# Altium PCB batteryPCB.PcbDoc
Units mm, origin at the board's own origin, x right, y up, seen from the top; angles counter-clockwise.
Board outline 73.43 x 79.43 mm, 2 copper layers (Top Layer, Bottom Layer); 14 components, 9 nets, 107 pads, 11 vias.
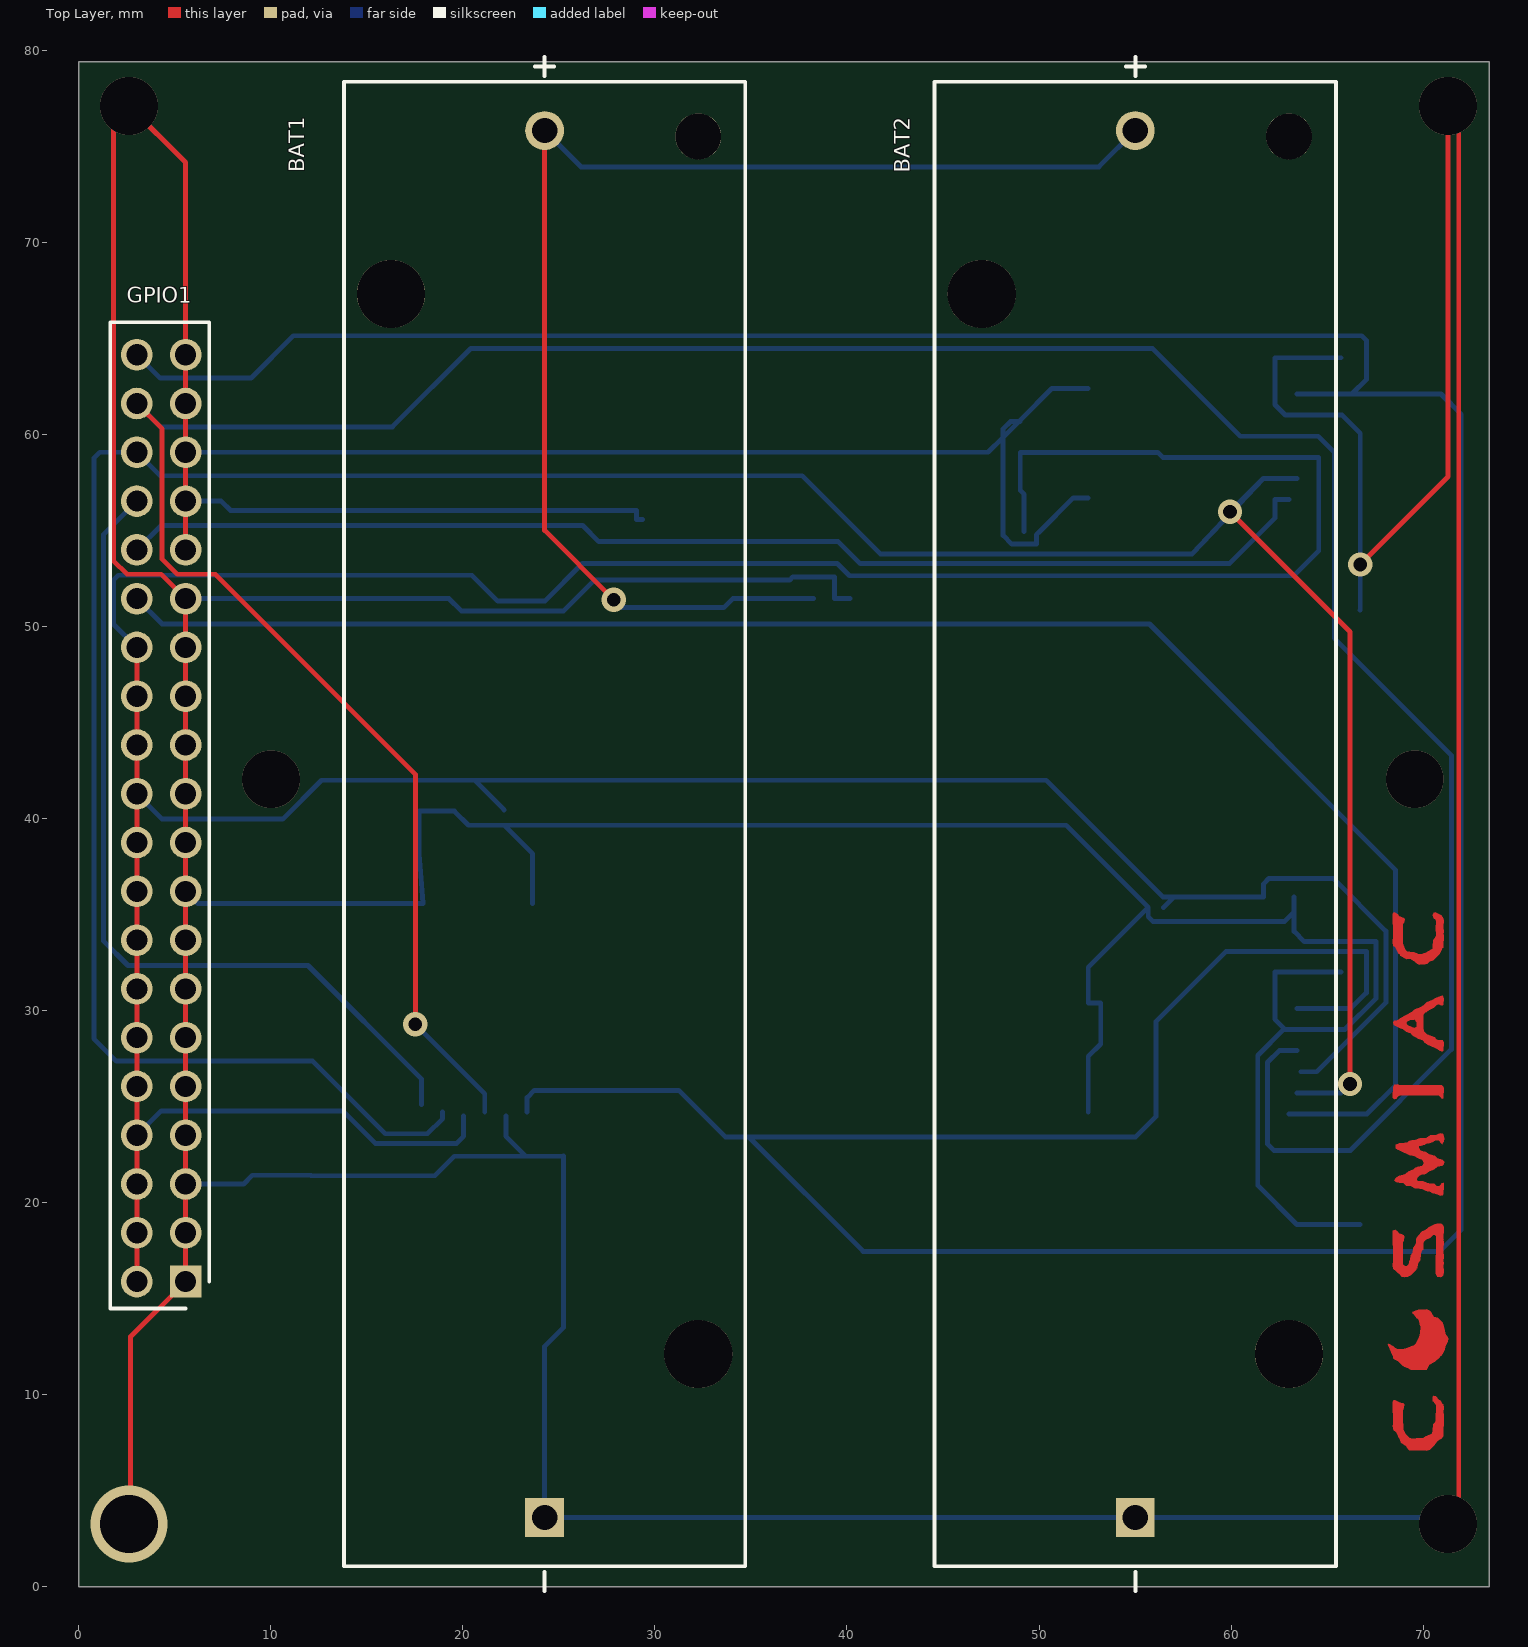
[diagram p0: Top Layer view]
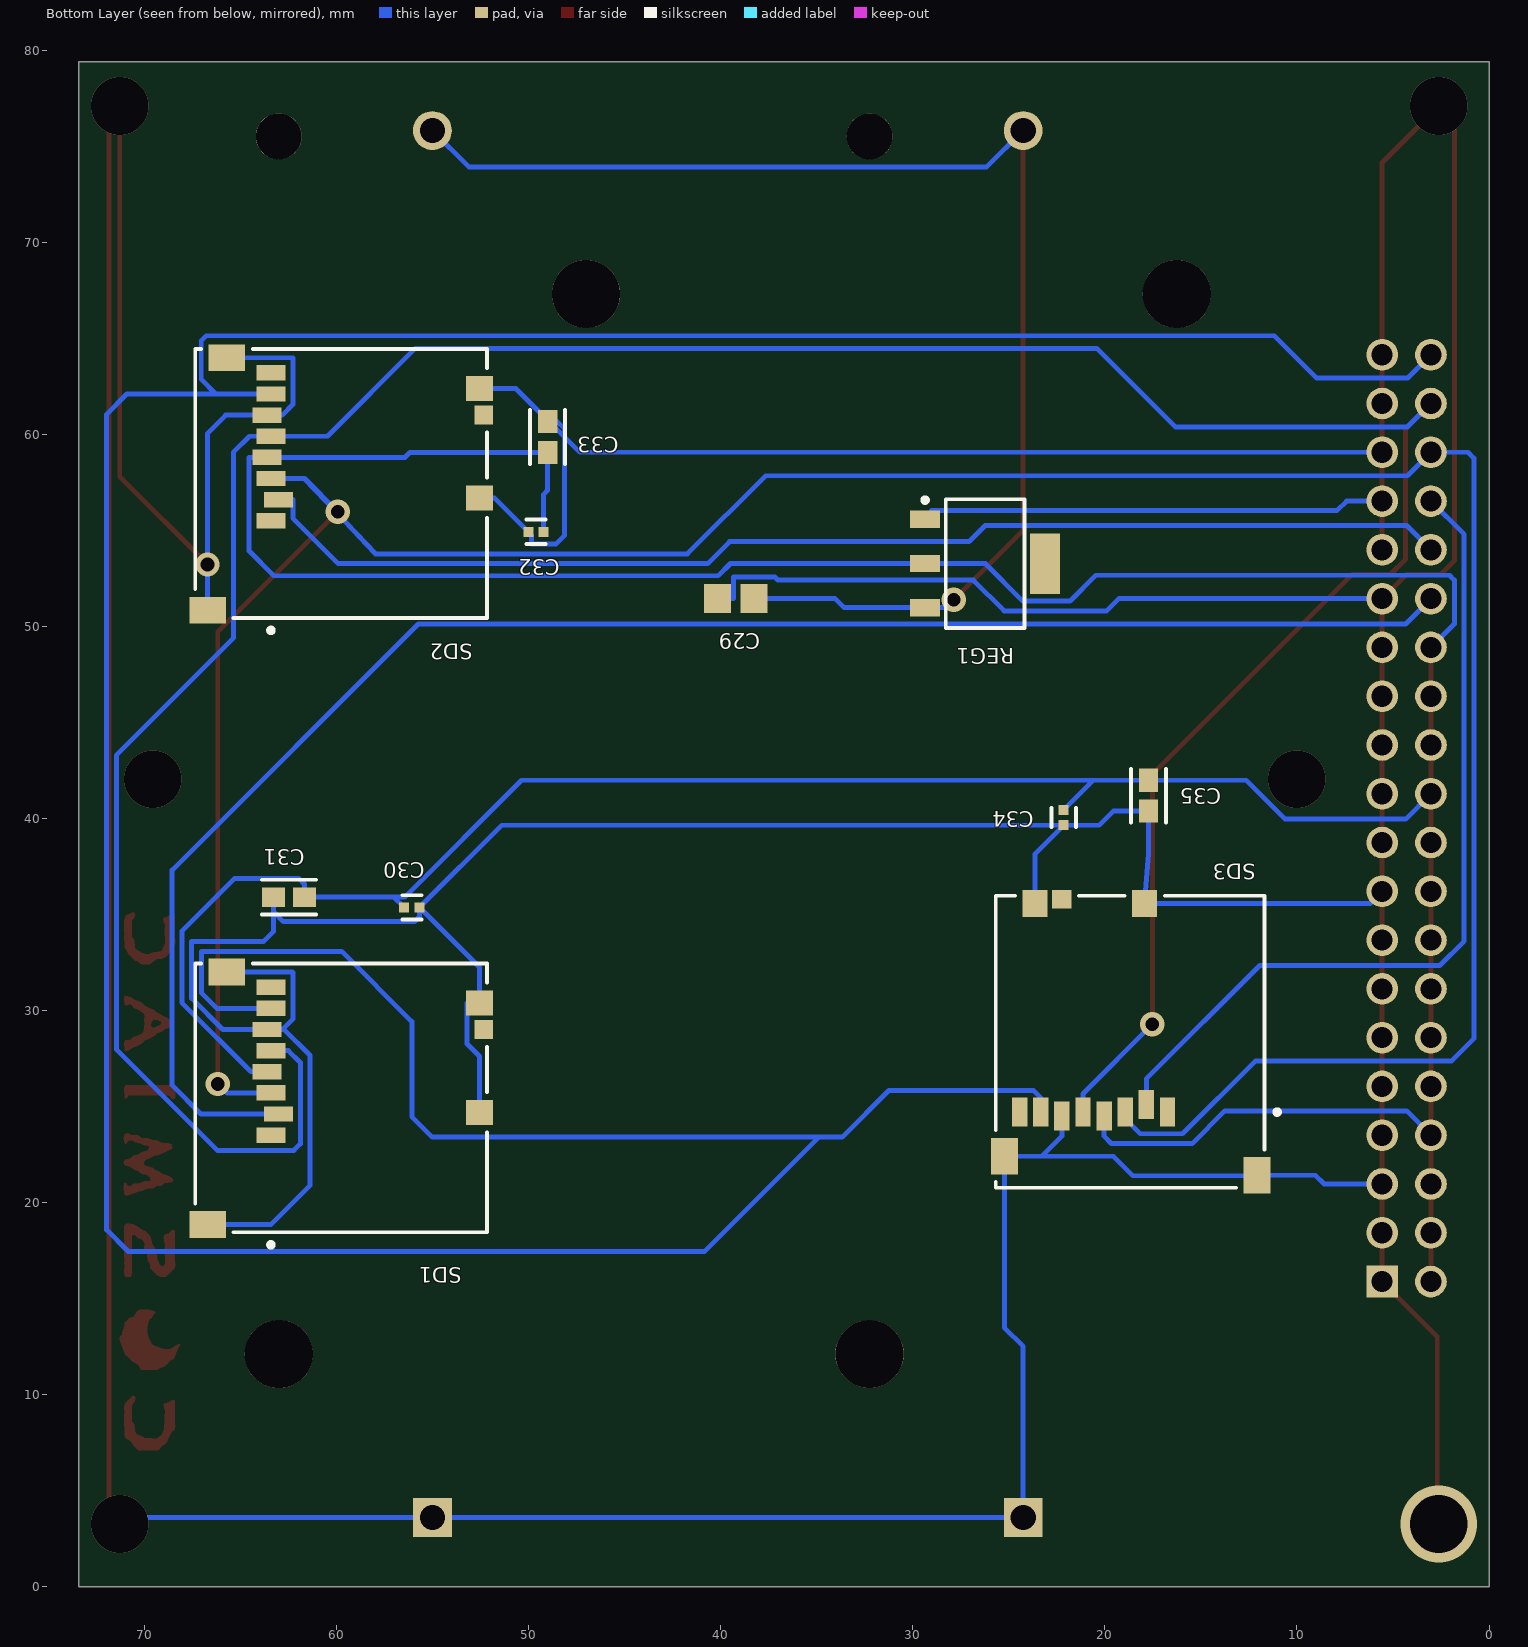
[diagram p1: Bottom Layer view, seen from below]
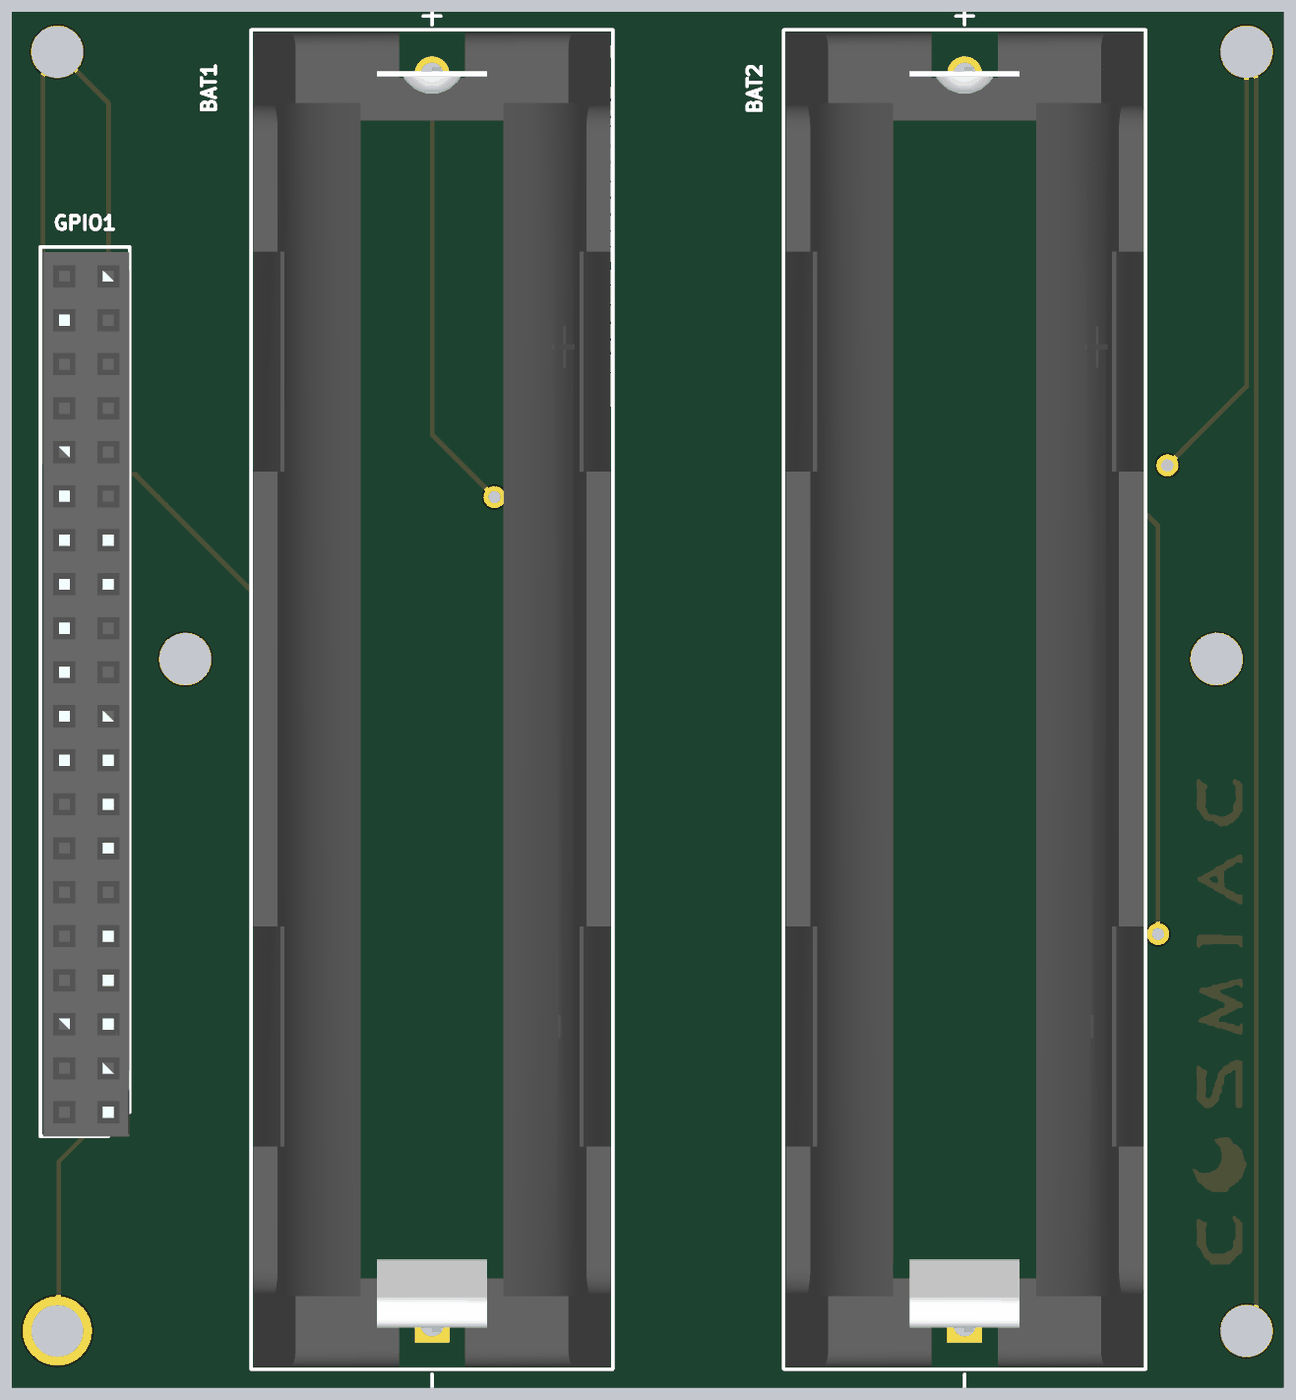
[diagram p2: 3D render of the assembled board from above, using the file's embedded part models]
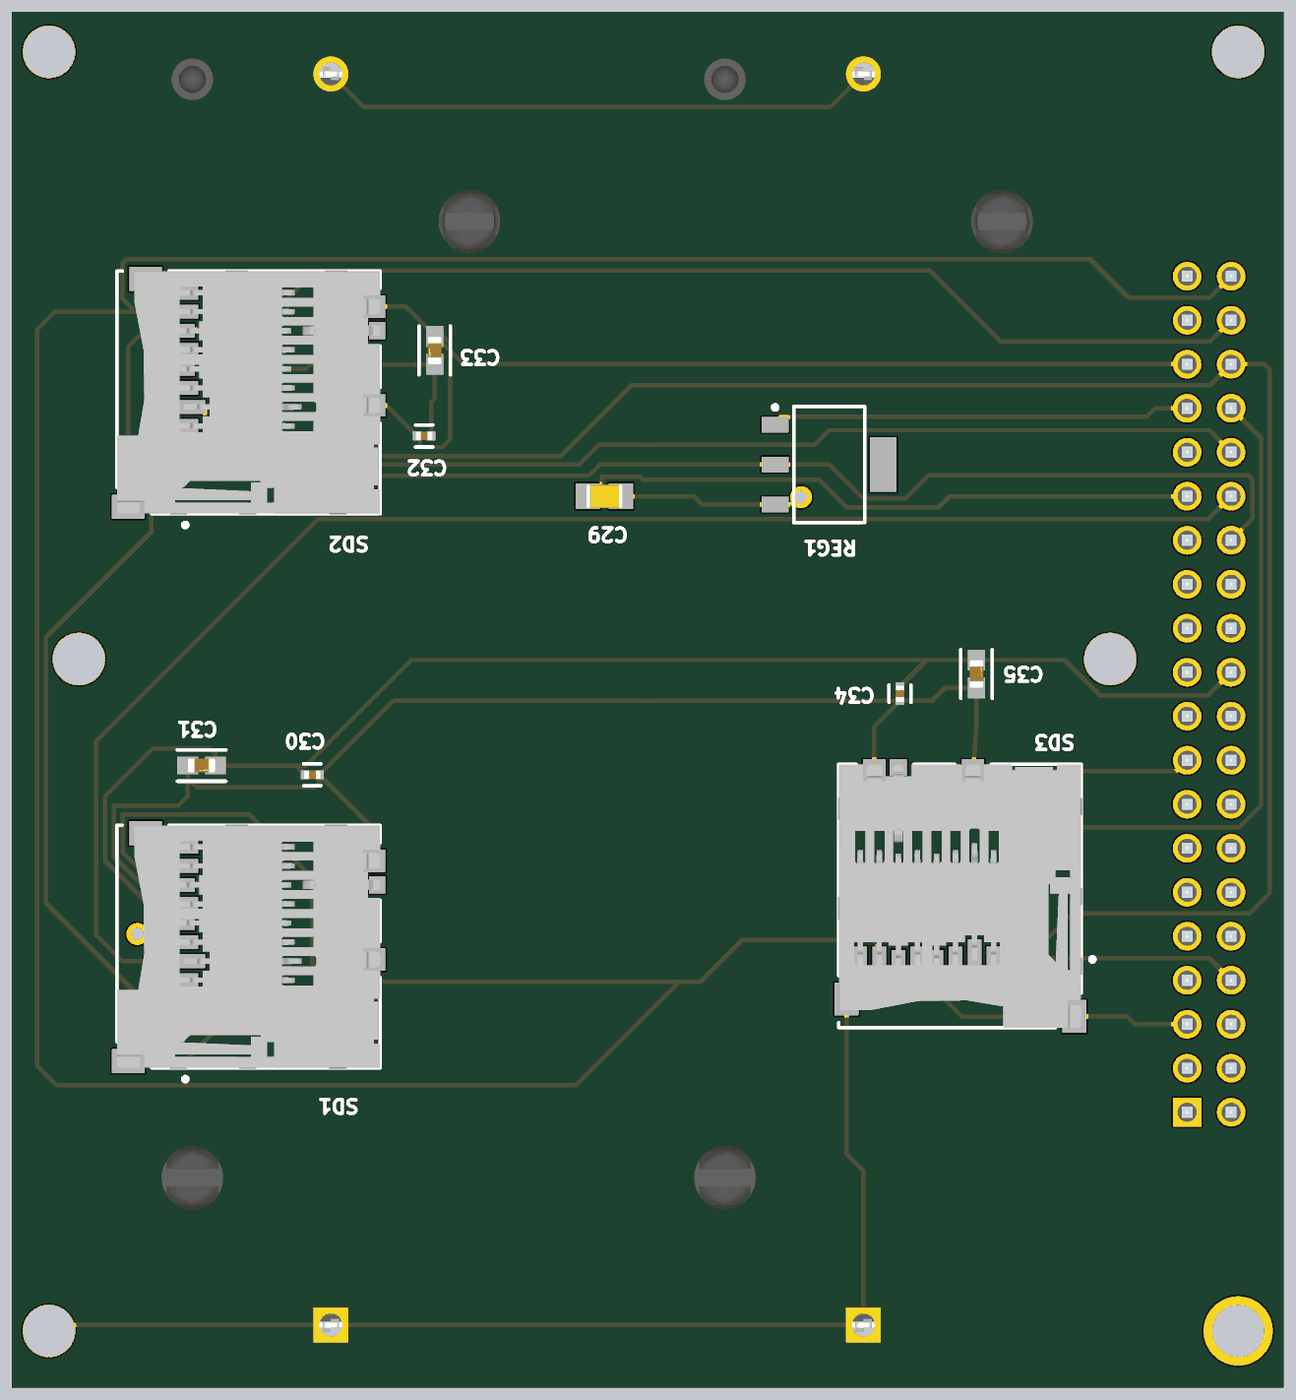
[diagram p3: 3D render of the assembled board from below, using the file's embedded part models]

## Layer stack, top to bottom
Top Solder: solder mask 0.0102, Solder Resist, Dk 3.5
Top Layer: signal copper 0.0356
Dielectric 1: dielectric 0.32, FR-4, Dk 4.8
Bottom Layer: signal copper 0.0356
Bottom Solder: solder mask 0.0102, Solder Resist, Dk 3.5

## Board outline
0,0 73.431,0 73.431,79.426 0,79.426

## Design rules (kind name [scope] priority, off if disabled: settings)
Clearance [All] p1: gap=0.254 ignorepadtopadclearanceinfootprint=FALSE
PolygonConnect [All] p1: connectstyle=Relief reliefconductorwidth=0.254 reliefentries=4 polygonreliefangle="90 Angle" airgapwidth=0.254
RoutingVias [All] p1: holewidth=0.711 width=1.27 viastyle="Through Hole" minholewidth=0.711 minwidth=1.27 maxholewidth=0.711 maxwidth=1.27
SolderMaskExpansion [All] p1: expansion=0.102 istentingtop=FALSE
SupplyNets "Schematic Supply Nets_2" [InNet('3V3_BAT')] p1: voltage=0.000
SupplyNets "Schematic Supply Nets" [InNet('GND')] p2: voltage=0.000
Width [All] p1: maxlimit=0.254 minlimit=0.254 preferedwidth=0.254
30 further rules are at their usual default settings.

## Classes and differential pairs
component class sdBatteryBoard: C30 C31 C32 C33 C34 C35 SD1 SD2 SD3
component class batteryBoardSheet1: BAT1 BAT2 C29 GPIO1 REG1

## Components (designator, comment, footprint, x,y, rotation, side; value= is the part's Value field where it differs from the comment)
BAT1 "1043P" FP-1043P-MFG 24.257,39.726 r90 top locked
BAT2 "1043P" FP-1043P-MFG 55.016,39.726 r90 top locked
C29 "4.7uF" CAPC2013X135X45LL10T25 39.218,51.46 r180 bottom
C30 "100nF" FP-C0402-BB-MFG 56.09,35.382 r180 bottom value="0.10 μF"
C31 "10uF" FP-GRM188-0_1-e0_2_0_55-IPC_A 62.484,35.916 r180 bottom
C32 "100nF" FP-C0402-BB-MFG 49.625,54.94 r0 bottom value="0.10 μF"
C33 "10uF" FP-GRM188-0_1-e0_2_0_55-IPC_A 49.022,59.879 r270 bottom
C34 "100nF" FP-C0402-BB-MFG 22.149,40.062 r270 bottom value="0.10 μF"
C35 "10uF" FP-GRM188-0_1-e0_2_0_55-IPC_A 17.729,41.199 r90 bottom
GPIO1 "2223" RHDR40W64P254X254_2X20_5105X500X865P 5.563,15.9 r90 top
REG1 "3V3" ADI-KC-3_L 26.238,53.289 r180 bottom
SD1 "473521001" MOLX-473521001_V 59.766,25.464 r270 bottom
SD2 "473521001" MOLX-473521001_V 59.766,57.455 r270 bottom
SD3 "473521001" MOLX-473521001_V 18.682,28.385 r180 bottom

## Footprints (in the part's own frame and the unit in brackets; to place one, negate y for a bottom-side part, rotate by r counter-clockwise, add the part's x,y. Pads: shape width x height; smd on the part's side, far side on the other; paste and mask are expansions set on the pad)
ADI-KC-3_L [mm] "SOT223, 4-Leads, Body 6.5x3.5mm, Pitch 2.3mm, IPC High Density"
  rect 1.55x0.9 smd: 1(-3.125,2.3) 2(-3.125,0) 3(-3.125,-2.3)
  rect 1.55x3.15 smd: 4(3.125,0)
  silkscreen extent -3.25,-3.35 2.05,3.42, body extent -1.85,-3.35 1.85,3.35, height 1.8
CAPC2013X135X45LL10T25 [mm] "Chip Capacitor, 2-Leads, Body 2.10x1.35mm, IPC High Density"
  rect 1.4x1.5 smd: 1(-0.95,0) 2(0.95,0)
  body extent -1.05,-0.67 1.05,0.67, height 1.35
FP-1043P-MFG [mm]
  rect 2.02x2.02 hole 1.32 paste-2539.97 mask+0: 1(-36.11,0)
  round 2.02 hole 1.32 paste-2539.97 mask+0: 2(36.11,0)
  round 3.55 hole 3.55 unplated paste-2539.97 mask+0: ""(-27.6,-8) ""(27.6,8)
  round 2.39 hole 2.39 unplated paste-2539.97 mask+0: ""(35.8,-8)
  silkscreen extent -39.95,-10.45 39.95,10.45, body extent -38.75,-10.55 38.75,10.55, height 0.25
FP-C0402-BB-MFG [mm]
  rect 0.52x0.52 smd paste+0 mask+0: 1(-0.4,0) 2(0.4,0)
  silkscreen extent -0.5,-0.64 0.5,0.64, body extent -0.5,-0.25 0.5,0.25, height 0.55
FP-GRM188-0_1-e0_2_0_55-IPC_A [mm]
  rect 1.208x1.012 smd paste+0 mask+0: 1(-0.802,0) 2(0.802,0)
  silkscreen extent -1.41,-0.91 1.41,0.91, body extent -0.8,-0.4 0.8,0.4, height 0.9
MOLX-473521001_V [mm] "SMD, 8-Leads, Body 15.2x14mm, Pitch 1.1mm"
  rect 0.8x1.5 smd: 1(1.94,-3.66) 2(0.84,-3.26) 3(-0.26,-3.66) 4(-1.36,-3.86) 5(-2.46,-3.66) 6(-3.56,-3.86) 7(-4.66,-3.66) 8(-5.76,-3.66)
  rect 1x0.95 smd: 9(-3.56,7.425)
  rect 1.3x1.4 smd: 10(-4.95,7.2) 11(0.75,7.2)
  rect 1.4x1.9 smd: 12(6.6,-6.95) 13(-6.55,-5.95)
  silkscreen extent -7,-7.6 7.77,7.6, body extent -7.05,-7.6 7.05,7.6, height 1.85
RHDR40W64P254X254_2X20_5105X500X865P [mm]
  rect 1.65x1.65 hole 1.1: 1(0,0)
  round 1.65 hole 1.1: 2(0,2.54) 3(2.54,0) 4(2.54,2.54) 5(5.08,0) 6(5.08,2.54) 7(7.62,0) 8(7.62,2.54) 9(10.16,0) 10(10.16,2.54) 11(12.7,0) 12(12.7,2.54) 13(15.24,0) 14(15.24,2.54) 15(17.78,0) 16(17.78,2.54) 17(20.32,0) 18(20.32,2.54) 19(22.86,0) 20(22.86,2.54) 21(25.4,0) 22(25.4,2.54) 23(27.94,0) 24(27.94,2.54) 25(30.48,0) 26(30.48,2.54) 27(33.02,0) 28(33.02,2.54) 29(35.56,0) 30(35.56,2.54) 31(38.1,0) 32(38.1,2.54) 33(40.64,0) 34(40.64,2.54) 35(43.18,0) 36(43.18,2.54) 37(45.72,0) 38(45.72,2.54) 39(48.26,0) 40(48.26,2.54)
  silkscreen extent -1.4,-1.23 49.95,3.92, body extent -1.4,-1.23 49.65,3.77, height 8.65

## Part data
BAT1 BAT2: library part CMP-19636-000034-1, "BATT HOLDER 18650 1 CELL PC PIN", Max Operating Temperature=145°C, Min Operating Temperature=-50°C, Package Quantity=50, Mount="Through Hole", Number of Cells=1, Packaging=Tray, Series=-, Termination="PC Pin"
C29: library part CMP-1662-00015-2, "Chip Capacitor, 4.7 uF, +/- 10%, 16 V, -55 to 85 degC, 0805 (2012 Metric), RoHS, Tape and Reel", Capacitance="4.7 uF", Case Code (Imperial)=0805, Case Code (Metric)=2012, Max Operating Temperature="85 degC", Min Operating Temperature="-55 degC", Package Quantity=3000, PartNumber=GRM21BR61C475KA88L, Tolerance=10%, Type (Capacitors)=X5R, Voltage Rating="16 V", Case\/Package=0805, ComponentLink1Description="Manufacturer URL", ComponentLink1URL=http://www.murata.com/, ComponentLink2Description=Datasheet, ComponentLink2URL=http://search.murata.co.jp/Ceramy/image/img/A01X/G101/ENG/GRM21BR61C475KA88-01.pdf, DatasheetVersion=03/2016, Height="1.25 mm", Length="2 mm", Mount="Surface Mount", Mounting Technology="Surface Mount", PackageDescription="2-Pin Surface Mount Device, Body 2 x 1.25 mm", PackageReference=0805, Packaging="Tape and Reel", Pins=2, Radiation Hardening=No, REACH SVHC="No SVHC", RoHSCompliant=true, Voltage Rating (DC)="16 V", Width="1.25 mm"
C30 C32 C34: library part CMP-2008-02046-2, "CAP CER 0.1UF 10V X5R 0402", Capacitance="0.10 μF", Manufacturer=Kemet, Manufacturer Part Number=C0402C104K8PACTU, Package=C0402-BB, Temperature="-55°C to +125°C", Temperature Characteristic=X5R, Temperature Coefficient=15%, Temperature Range High=+125°C, Temperature Range Low=-55°C, Tolerance=0.1, Voltage Rating="10 V", Automotive=No, Category=Cap, ComponentLink2Description=Datasheet, ComponentLink2URL=https://content.kemet.com/datasheets/KEM_C1002_X7R_SMD.pdf, Device Class L1="Passive Components", Device Class L2=Capacitors, Device Class L3="Ceramic Capacitors", Digikey Description="CAP CER 0.1UF 10V X5R 0402", Height=0.55mm, Ipc Land Pattern Name=CAPC10050X50, Lead Free=Yes, Material=Ceramic, Mouser Description="Capacitor 100 nF 10 VDC 0402", Octopart=https://octopart.com/c0402c104k8pactu-kemet-140039, RoHS=TRUE
C31 C33 C35: library part CMP-2006-02792-2, "Chip Multilayer Ceramic Capacitors for General Purpose, 0603, 10uF, X5R, 15%, 20%, 6.3V", Case Code (Imperial)=0603, Case Code (Metric)=1608, Dielectric=X5R, Max Operating Temperature=85°C, Min Operating Temperature=-55°C, Package Quantity=4000, Tolerance=20%, Voltage=6.3V, Capacitance=10uF, Case/Package=0603, Depth=0.8mm, Height=0.8mm, Lead Free="Lead Free", Length=1.6mm, Material=Ceramic, Mount="Surface Mount", Packaging="Tape and Reel", Radiation Hardening=No, REACH SVHC="No SVHC", Termination=SMD/SMT, Thickness=0.035inch, Voltage Rating=6.3V, Voltage Rating (DC)=6.3V, Width=0.031inch
GPIO1: "Connector", Manufacturer_Name=Adafruit, Mouser Part Number=485-2223, Arrow Part Number=2223, Arrow Price/Stock=https://www.arrow.com/en/products/2223/adafruit-industries?region=nac, Datasheet Link=https://cdn-shop.adafruit.com/product-files/2223/18507.pdf, Height=8.65mm, Manufacturer_Part_Number=2223, Mouser Price/Stock=https://www.mouser.co.uk/ProductDetail/Adafruit/2223?qs=GURawfaeGuDU%2FR2tcwJycQ%3D%3D
REG1: library part CMP-0786-00152-1, "High Accuracy, Ultralow IQ, 1 A, anyCAP(R) Low Dropout Regulator, 2.7 to 8 V Vin, 3.3 V Vout, Industrial, 3-pin SOT223 (KC-3), Reel", Manufacturer="Analog Devices", PartNumber=ADP3338AKCZ-3.3-RL, Preset Vout Values (V)=3.3, Supply Current IGND @ Small Load=110uA, Code_JEDEC=TO-261-AA, ComponentLink1Description="Manufacturer URL", ComponentLink1URL=http://www.analog.com/en/index.html, ComponentLink2Description=Datasheet, ComponentLink2URL=http://www.analog.com/static/imported-files/data_sheets/ADP3338.pdf, ComponentLink3Description="Package Specification", ComponentLink3URL=http:/www.analog.com/static/imported-files/packages/PKG_PDF/SOT_223(KC)/KC_3.pdf, ComponentLink4Description="URL Link1", ComponentLink4URL="Product URL:http://www.analog.com/en/ADP3338/productSearch.html", DatasheetVersion="Rev. B", Iout max=1A, Mounting Technology="Surface Mount", PackageDescription="3-Pin Small Outline Transistor Package, Body 3.5 x 6.5 mm, Pitch 2.3 mm", PackageReference=KC-3, PackageVersion="11-20-2012-B, 11/2012", Packing=Reel, Vin (max) (V)=8, Vin (min) (V)=2.7
SD1 SD2 SD3: library part CN-SD-8-1SW-4S, "MicroSD(TM), Pitch 1.1 mm, 8 Position, Height 1.88 mm, -20 to 85 degC, RoHS, Tape and Reel", Manufacturer=Molex, Package Description="MicroSD(TM), Pitch 1.1 mm, 8 Position, Height 1.88 mm", Supplier Part Number 1=538-47352-1001, Datasheet URL=http://www.molex.com/pdm_docs/sd/473521001_sd.pdf, Datasheet Version="Rev. G, 01/2012", Manufacturer URL=http://www.molex.com/, Mounting Technology=SurfaceMount, Package Reference=473521001, Supplier 1=Mouser

## Via types
v1: diameter 1.27, hole 0.711, Top Layer to Bottom Layer, 5 vias
v2: diameter 3, hole 3, Top Layer to Bottom Layer, 5 vias
v3: diameter 4, hole 3, Top Layer to Bottom Layer, 1 vias

## Nets (pads, with @x,y where several pads share a name; then routed paths per layer and width w, separated by ;. In a path a pad name is that pad's centre, name@x,y a point inside that pad or via, vN(x,y) a via of type N, cw(c..) or ccw(c..) an arc to the next point about the centre after c; other vN are vias at no path point)
3V3_BAT: C30.1 C31.2 C32.1 C33.2 C34.1 C35.2 GPIO1.2 GPIO1.4 GPIO1.6 GPIO1.8 GPIO1.10 GPIO1.12 GPIO1.14 GPIO1.16 GPIO1.18 GPIO1.20 GPIO1.22 GPIO1.24 GPIO1.26 GPIO1.28 REG1.2 SD1.4 SD2.4 SD3.4 | length 229.7
  Top Layer w0.254: GPIO1.2 GPIO1.4 GPIO1.6 GPIO1.8 GPIO1.10 GPIO1.12 GPIO1.14 GPIO1.16 GPIO1.18 GPIO1.20 GPIO1.22 GPIO1.24 GPIO1.26 GPIO1.28
  Bottom Layer w0.254: GPIO1.8 4.293,24.79 13.749,24.79 15.453,23.086 19.659,23.086 20.042,23.47 SD3.4 ; GPIO1.22 4.343,39.98 10.617,39.98 12.638,42.001 C35.2 20.61,42.001 ; GPIO1.28 1.803,50.14 1.803,52.426 2.057,52.68 20.472,52.68 21.819,51.333 24.269,51.333 26.225,53.289 REG1.2 39.497,53.289 40.132,52.654 63.271,52.654 64.567,53.95 64.567,58.815 SD2.4 56.447,58.815 56.185,59.077 C33.2 49.022,57.099 49.225,56.896 C32.1 ; C34.1 20.61,42.001 ; C30.1 57.023,35.916 ; SD1.4 64.462,26.824 68.063,30.425 68.063,34.146 65.318,36.892 61.976,36.892 61.682,36.598 C31.2 57.023,35.916 ; 20.61,42.001 50.379,42.001 56.464,35.916 57.023,35.916
CS1: GPIO1.30 SD1.2 | length 88.8
  Bottom Layer w0.254: GPIO1.30 4.343,50.14 55.753,50.14 68.571,37.321 68.571,26.124 67.072,24.624 SD1.2
CS2: GPIO1.32 SD2.2 | length 63.3
  Bottom Layer w0.254: GPIO1.32 4.293,55.27 26.238,55.27 27.076,54.432 39.54,54.432 40.689,53.283 59.913,53.283 62.281,55.651 62.281,56.615 SD2.2
CS3: GPIO1.34 SD3.2 | length 44.5
  Bottom Layer w0.254: GPIO1.34 1.295,54.813 1.295,33.63 2.565,32.36 11.938,32.36 17.842,26.455 SD3.2
GND: BAT1.1 BAT2.1 C29.1 C30.2 C31.1 C32.2 C33.1 C34.2 C35.1 GPIO1.1 GPIO1.3 GPIO1.5 GPIO1.7 GPIO1.9 GPIO1.11 GPIO1.13 GPIO1.15 GPIO1.17 GPIO1.19 GPIO1.21 GPIO1.23 GPIO1.25 GPIO1.27 GPIO1.29 GPIO1.31 GPIO1.33 GPIO1.35 GPIO1.37 GPIO1.39 REG1.1 SD1.6 SD1.10 SD1.11 SD1.12 SD1.13 SD2.6 SD2.10 SD2.11 SD2.12 SD2.13 SD3.6 SD3.10 SD3.11 SD3.12 SD3.13 | length 554.4
  Top Layer w0.254: v3(2.616,3.277) 2.692,3.353 2.692,13.03 GPIO1.1 5.563,17.17 GPIO1.3 5.563,19.71 GPIO1.5 GPIO1.7 GPIO1.9 GPIO1.11 GPIO1.13 GPIO1.15 GPIO1.17 GPIO1.19 GPIO1.21 GPIO1.23 GPIO1.25 GPIO1.27 GPIO1.29 4.293,52.73 2.515,52.73 1.803,53.442 1.803,76.302 v2(2.616,77.114) 5.563,74.168 GPIO1.39 GPIO1.37 GPIO1.35 GPIO1.33 GPIO1.31 ; v1(66.726,53.238) 71.298,57.81 v2(71.298,77.114) 71.857,76.556 71.857,3.835 v2(71.298,3.277)
  Bottom Layer w0.254: GPIO1.5 8.585,20.98 9.04,21.435 SD3.12 12.082,21.412 18.542,21.412 19.558,22.428 23.284,22.428 ; GPIO1.17 6.198,35.585 SD3.11 17.729,38.176 C35.1 19.558,40.397 20.293,39.662 C34.2 ; GPIO1.29 19.278,51.46 19.914,50.825 25.247,50.825 26.848,52.426 37.02,52.426 37.186,52.591 39.349,52.591 39.349,51.46 C29.1 ; GPIO1.33 7.417,56.54 7.899,56.058 29.032,56.058 29.032,55.589 REG1.1 ; GPIO1.35 47.346,59.08 48.133,59.868 ; SD3.6 22.242,23.47 23.284,22.428 ; SD3.10 23.632,38.179 C34.2 ; SD3.13 SD3.13@25.232,22.428 ; SD1.11 52.566,27.623 53.213,28.27 53.213,30.414 SD1.10 52.566,32.259 C30.2 ; SD2.11 51.79,56.705 C32.2 49.866,54.781 49.866,54.299 48.59,54.299 48.133,54.756 48.133,59.868 ; SD2.10 50.67,62.405 C33.1@49.022,60.757 ; C31.1 63.286,35.154 ; SD1.13 62.291,32.014 62.281,32.004 62.281,29.566 62.78,29.066 ; SD2.13 62.281,64.005 62.281,61.57 62.836,61.015 SD2.6 65.786,61.015 66.726,60.075 v1(66.726,53.238) 66.726,50.855 SD2.12 ; SD1.12 63.432,18.864 61.387,20.909 61.387,27.673 62.78,29.066 ; v2(71.298,3.277) 70.959,3.616 BAT2.1 BAT1.1 24.257,12.522 25.232,13.498 SD3.13@25.232,22.428 ; C34.2 51.41,39.662 C30.2 ; 23.284,22.428 SD3.13@25.232,22.428 ; 48.133,59.868 C33.1@48.946,60.681 ; 48.133,59.868 48.133,60.3 48.514,60.681 C33.1@48.946,60.681 ; C33.1@48.946,60.681 C33.1 C33.1@49.022,60.757 ; C33.1@48.946,60.681 C33.1@49.022,60.757 ; C30.2 55.69,34.9 55.944,34.646 62.778,34.646 63.286,35.154 ; 62.78,29.066 62.822,29.024 SD1.6 ; 62.78,29.066 SD1.6 ; 63.286,35.154 63.286,34.138 63.819,33.604 67.555,33.604 67.555,30.649 65.93,29.024 SD1.6
MISO: GPIO1.40 SD1.7 SD2.7 SD3.7 | length 218.8
  Bottom Layer w0.254: GPIO1.40 4.242,62.941 8.966,62.941 11.176,65.151 66.802,65.151 67.056,64.897 67.056,62.877 66.294,62.115 ; SD3.7 23.342,25.476 23.723,25.857 31.242,25.857 33.68,23.419 34.9,23.419 ; SD1.7 66.238,30.124 67.047,30.933 67.047,33.096 59.741,33.096 56.083,29.439 56.083,24.486 55.016,23.419 34.9,23.419 ; SD2.7 66.294,62.115 ; 34.9,23.419 40.843,17.475 70.866,17.475 71.984,18.593 71.984,61.062 70.93,62.115 66.294,62.115
MOSI: GPIO1.36 SD1.3 SD2.3 SD3.3 | length 155.5
  Top Layer w0.254: v1(59.944,55.982) 66.192,49.733 v1(66.192,26.187)
  Bottom Layer w0.254: SD3.3 18.942,24.384 18.153,23.594 15.961,23.594 12.174,27.381 1.956,27.381 0.787,28.55 0.787,58.776 1.092,59.08 GPIO1.36 4.242,57.861 37.668,57.861 41.738,53.791 57.976,53.791 59.996,55.933 61.677,57.715 ; v1(59.944,55.982) 61.677,57.715 ; SD1.3 65.729,25.724 v1(66.192,26.187) ; SD2.3 61.677,57.715
NetBAT1_2: BAT1.2 BAT2.2 C29.2 REG1.3 | length 69
  Top Layer w0.254: BAT1.2 24.257,55.016 v1(27.864,51.41)
  Bottom Layer w0.254: BAT1.2 26.153,73.939 53.12,73.939 BAT2.2 ; v1(27.864,51.41) 28.284,50.989 REG1.3 33.579,50.989 34.05,51.46 C29.2
SCK: GPIO1.38 SD1.5 SD2.5 SD3.5 | length 163.9
  Top Layer w0.254: GPIO1.38 4.343,60.3 4.343,53.514 5.127,52.73 7.112,52.73 17.526,42.316 v1(17.526,29.296)
  Bottom Layer w0.254: GPIO1.38 4.242,60.401 16.332,60.401 20.422,64.491 55.905,64.491 60.481,59.915 SD2.5 64.541,59.915 65.38,59.077 65.38,49.403 71.476,43.307 71.476,27.991 66.218,22.733 62.23,22.733 61.895,23.068 61.895,27.305 62.514,27.924 SD1.5 ; v1(17.526,29.296) 21.142,25.679 SD3.5
pads on no net: BAT1. BAT2. REG1.4 SD1.1 SD1.8 SD1.9 SD2.1 SD2.8 SD2.9 SD3.1 SD3.8 SD3.9
copper on no net:
  other v2: 10.008,42.062 69.571,42.062

## Other copper
Top Layer:
  region: 69.388,20.871 69.131,20.893 69.013,20.989 68.981,21.021 68.767,21.043 68.617,21.064 68.499,21.161 68.563,21.268 68.595,21.3 68.638,21.321 68.767,21.407 68.852,21.428 68.959,21.471 69.099,21.525 69.259,21.642 69.463,21.717 69.538,21.771 69.581,21.814 69.731,21.878 69.956,21.932 70.02,21.975 70.041,22.06 70.02,22.167 69.945,22.242 69.795,22.307 69.688,22.349 69.559,22.435 69.474,22.457 69.302,22.478 68.81,22.714 68.67,22.767 68.595,22.821 68.563,22.853 68.585,23.024 68.617,23.056 68.767,23.099 68.949,23.11 68.981,23.099 69.045,23.121 69.195,23.142 69.259,23.206 69.302,23.228 69.409,23.271 69.559,23.249 69.752,23.335 69.838,23.356 70.18,23.378 70.373,23.506 70.523,23.528 70.716,23.549 70.823,23.592 70.909,23.613 71.016,23.592 71.048,23.56 71.069,23.474 71.091,23.324 71.069,23.174 71.005,23.067 70.995,23.056 70.898,23.153 70.877,23.196 70.845,23.228 70.759,23.249 70.609,23.228 70.48,23.142 70.309,23.099 70.17,23.067 70.095,23.035 69.988,22.992 69.902,22.971 69.773,22.949 69.763,22.896 69.848,22.746 69.988,22.692 70.106,22.66 70.33,22.542 70.598,22.446 70.652,22.392 70.695,22.371 70.737,22.328 71.005,22.232 71.091,22.146 71.069,21.996 70.995,21.921 70.748,21.867 70.577,21.76 70.48,21.707 70.309,21.642 70.191,21.546 70.073,21.493 69.913,21.46 69.806,21.418 69.699,21.31 69.677,21.225 69.699,21.161 69.731,21.128 69.827,21.118 70.009,21.128 70.202,21.043 70.288,21.021 70.588,21 70.695,20.893 70.78,20.871 70.866,20.893 70.898,20.925 70.962,21.032 71.037,21.043 71.069,21.011 71.08,20.871 71.059,20.464 71.016,20.4 70.93,20.379 70.716,20.443 70.63,20.464 70.513,20.496 70.373,20.571 70.223,20.614 70.138,20.636 69.923,20.721 69.838,20.743 69.559,20.764 69.431,20.85 69.399,20.861
  region: 69.923,32.953 70.041,32.985 70.148,33.028 70.459,33.21 70.491,33.242 70.513,33.328 70.534,33.671 70.662,33.863 70.684,33.949 70.662,34.292 70.673,34.645 70.652,34.731 70.555,34.827 70.534,34.87 70.491,34.999 70.545,35.117 70.63,35.138 70.952,34.967 71.048,34.827 71.069,34.677 71.059,34.41 71.069,34.078 71.048,34.013 71.069,33.949 71.048,33.285 70.984,33.221 70.962,33.178 70.834,32.942 70.523,32.632 70.48,32.61 70.373,32.567 70.33,32.546 70.213,32.45 70.116,32.417 69.806,32.407 69.699,32.45 69.624,32.503 69.581,32.546 69.538,32.567 69.42,32.664 69.388,32.696 69.238,32.717 69.152,32.696 69.034,32.728 68.863,32.835 68.82,32.878 68.799,32.921 68.713,33.007 68.692,33.049 68.563,33.285 68.456,33.392 68.413,33.542 68.435,33.949 68.424,35.031 68.456,35.106 68.531,35.138 68.681,35.031 68.767,34.924 68.97,34.849 69.034,34.785 69.013,34.613 68.97,34.57 68.927,34.463 68.949,34.249 68.938,33.51 69.056,33.242 69.12,33.135 69.152,33.103 69.302,33.082 69.538,33.06 69.731,32.974 69.816,32.953 69.902,32.953
  region: 68.413,25.488 68.435,26.045 68.51,26.141 68.66,26.162 68.724,26.141 70.973,26.12 71.048,26.045 71.069,25.959 71.048,25.445 71.016,25.413 70.941,25.445 70.92,25.488 70.845,25.584 70.759,25.605 68.745,25.584 68.67,25.53 68.649,25.488 68.595,25.413 68.51,25.391 68.467,25.413 68.413,25.466
  region: 71.069,8.822 71.048,7.836 70.952,7.719 70.759,7.611 70.705,7.558 70.684,7.515 70.534,7.322 70.352,7.14 70.202,7.097 69.281,7.119 69.206,7.194 69.184,7.237 69.088,7.354 68.884,7.494 68.842,7.536 68.81,7.654 68.735,7.772 68.649,7.965 68.585,8.072 68.51,8.126 68.435,8.201 68.413,8.415 68.435,8.479 68.424,9.646 68.467,9.711 68.552,9.732 68.702,9.646 68.745,9.604 68.831,9.582 68.959,9.561 69.013,9.507 68.992,9.336 68.927,9.186 68.949,8.843 68.97,8.222 69.056,8.029 69.12,7.922 69.281,7.761 69.431,7.719 69.645,7.74 69.934,7.729 70.02,7.751 70.052,7.783 70.095,7.804 70.138,7.847 70.405,7.943 70.47,8.008 70.513,8.158 70.534,8.479 70.641,8.586 70.662,8.672 70.673,9.432 70.63,9.539 70.577,9.593 70.555,9.636 70.513,9.679 70.491,9.829 70.513,9.893 70.566,9.946 70.652,9.925 70.845,9.732 70.887,9.711 70.92,9.679 70.941,9.636 70.984,9.593 71.005,9.55 71.048,9.507 71.069,9.357 71.048,9.079 71.069,9.015 71.069,8.843
  region: 68.435,11.992 68.349,12.206 68.274,12.41 68.242,12.442 68.156,12.613 68.21,12.667 68.445,12.538 68.531,12.453 68.638,12.41 68.917,12.388 69.12,12.421 69.206,12.442 69.388,12.538 69.527,12.592 69.602,12.645 69.656,12.699 69.806,13.02 69.827,13.106 69.859,13.245 69.87,13.534 69.848,13.599 69.827,13.684 69.795,13.824 69.763,13.899 69.634,14.027 69.613,14.07 69.516,14.188 69.441,14.263 69.452,14.316 69.666,14.402 69.752,14.423 70.18,14.466 70.245,14.445 70.352,14.381 70.405,14.327 70.513,14.134 70.566,14.081 70.77,14.006 71.027,13.749 71.048,13.663 71.091,13.47 71.134,13.363 71.155,13.213 71.177,13.127 71.262,13.042 71.305,12.935 71.284,12.785 71.155,12.506 71.123,12.388 71.102,12.303 71.059,12.196 70.952,12.046 70.909,12.024 70.877,11.992 70.855,11.949 70.759,11.853 70.716,11.831 70.609,11.724 70.566,11.703 70.33,11.574 70.298,11.542 70.245,11.403 70.18,11.317 70.031,11.296 69.57,11.307 69.345,11.296 69.217,11.382 69.013,11.457 68.938,11.51 68.702,11.746 68.66,11.767 68.51,11.853 68.456,11.906 68.435,11.971
  region: 70.052,18.558 70.245,18.665 70.298,18.74 70.598,18.89 70.716,18.922 70.952,18.901 71.027,18.847 71.069,18.74 71.059,18.087 71.069,18.076 71.048,18.054 71.069,17.99 71.059,17.551 71.069,17.112 71.048,17.048 71.069,16.812 71.048,16.748 71.069,16.405 71.048,16.234 70.973,16.159 70.887,16.137 70.737,16.159 70.705,16.191 70.662,16.341 70.673,18.258 70.609,18.344 70.502,18.322 70.448,18.247 70.373,18.172 70.255,18.14 70.138,18.065 70.041,17.969 69.998,17.862 70.02,17.647 69.998,17.562 69.934,17.497 69.87,17.347 69.848,17.005 69.752,16.887 69.72,16.791 69.699,16.598 69.656,16.555 69.634,16.512 69.345,16.223 69.302,16.201 69.195,16.159 69.045,16.137 68.895,16.159 68.745,16.309 68.702,16.33 68.606,16.426 68.585,16.469 68.552,16.501 68.51,16.523 68.456,16.576 68.413,16.726 68.435,17.005 68.424,18.536 68.467,18.579 68.552,18.601 68.649,18.526 68.67,18.483 68.724,18.408 68.895,18.365 68.992,18.311 69.013,18.226 68.992,18.033 68.949,17.926 68.927,17.776 68.949,17.69 68.938,16.801 68.97,16.769 68.981,16.737 69.088,16.694 69.174,16.716 69.227,16.769 69.27,16.876 69.292,16.962 69.334,17.069 69.356,17.262 69.463,17.412 69.484,17.669 69.581,17.787 69.634,17.926 69.656,18.14 69.741,18.29 69.934,18.483 69.945,18.515 70.031,18.558
  region: 68.477,29.451 68.51,29.483 68.649,29.515 68.756,29.558 68.81,29.611 68.852,29.633 69.388,29.911 69.463,29.965 69.484,30.008 69.538,30.061 69.645,30.104 69.731,30.125 69.741,30.136 69.902,30.211 70.052,30.318 70.18,30.447 70.513,30.565 70.641,30.65 70.673,30.682 70.887,30.768 70.973,30.789 71.027,30.779 71.069,30.629 71.048,30.307 71.016,30.275 70.909,30.297 70.78,30.34 70.673,30.275 70.566,30.168 70.288,30.018 70.159,29.933 70.116,29.911 70.073,29.868 70.031,29.847 69.998,29.751 70.02,29.472 69.998,29.408 70.02,29.129 70.041,28.936 70.084,28.894 70.106,28.851 70.159,28.797 70.202,28.776 70.395,28.69 70.598,28.615 70.695,28.519 70.802,28.476 71.016,28.455 71.048,28.422 71.069,28.337 71.048,27.93 71.016,27.898 70.941,27.887 70.866,27.919 70.716,28.026 70.609,28.069 70.245,28.24 70.095,28.326 70.063,28.358 70.041,28.401 69.988,28.455 69.752,28.54 69.624,28.626 69.516,28.669 69.42,28.744 69.399,28.787 69.366,28.819 69.259,28.862 69.12,28.915 68.992,29.001 68.959,29.033 68.81,29.097 68.702,29.14 68.66,29.161 68.51,29.247 68.477,29.279 68.456,29.365 hole: 69.142,29.386 69.142,29.365 69.152,29.354 69.206,29.279 69.238,29.247 69.474,29.14 69.559,29.119 69.634,29.172 69.656,29.258 69.634,29.408 69.538,29.526 69.324,29.504 69.174,29.418